# Altium PCB ESP32.PcbDoc (part 3 of 3)
Units mm, origin at the board's own origin, x right, y up, seen from the top; angles counter-clockwise.
Board outline 71.12 x 25.4 mm, 4 copper layers (L1, L2, L3, L4), stack 1.604 mm thick; 64 components, 73 nets, 299 pads, 168 vias.
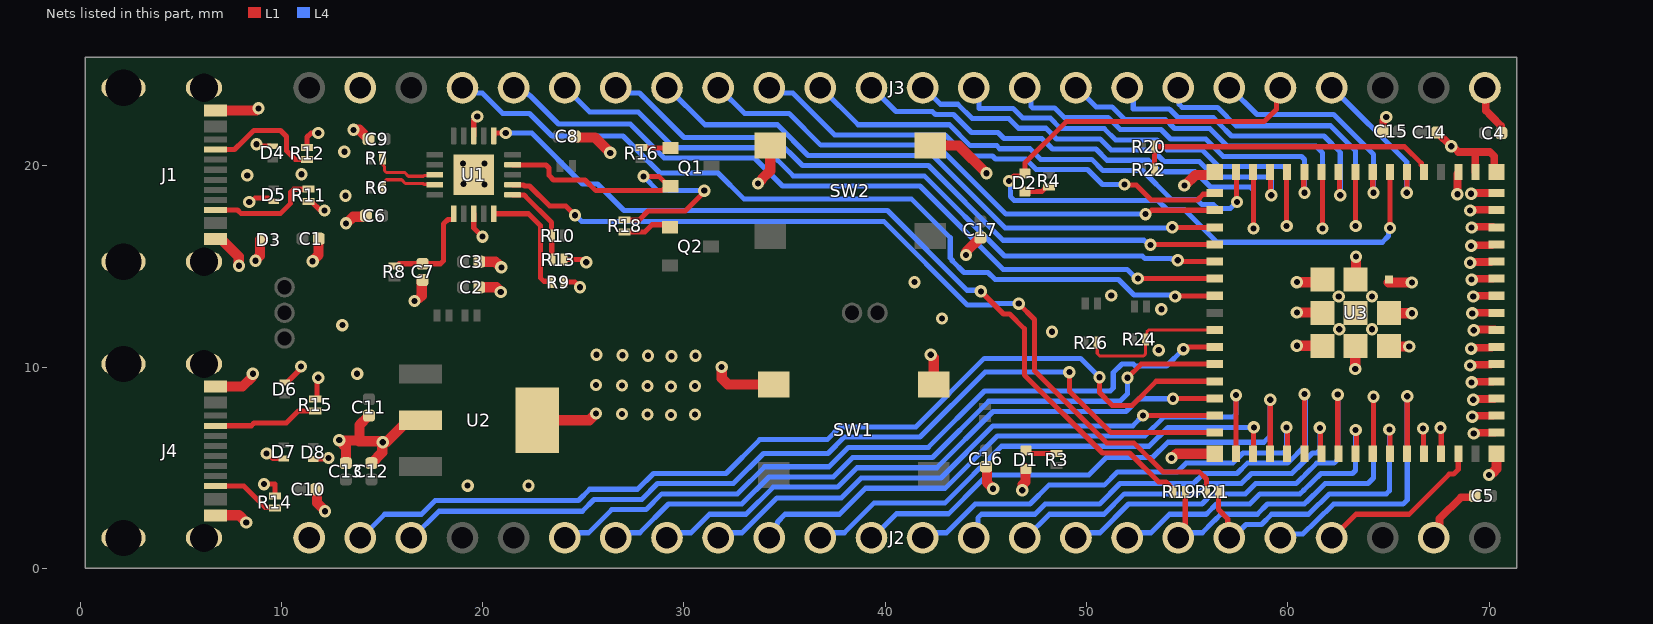
[diagram p4: the nets of this part, all layers, seen from the top]

## Via types
v1: diameter 0.61, hole 0.305, L1 to L4, tented both sides, 168 vias

## Nets (pads, with @x,y where several pads share a name; then routed paths per layer and width w, separated by ;. In a path a pad name is that pad's centre, name@x,y a point inside that pad or via, vN(x,y) a via of type N, cw(c..) or ccw(c..) an arc to the next point about the centre after c; other vN are vias at no path point) (continued)
ESP_USB_P: R24.2 R26.2 U3.24 | length 7.6
  L1 w0.153: R26.2@50.536,11.227 50.536,10.678 50.657,10.557 52.839,10.557 52.929,10.647 R24.2@52.929,11.379 52.999,11.449 52.999,11.757 53.091,11.85 55.765,11.85 U3.24@56.374,11.85
FTDI_RESET: C7.2 R8.2 U1.11 | length 5.2
  L1 w0.254: R8.2@15.621,15.032 15.746,15.032 15.851,15.137 C7.2@17.018,15.137 17.909,15.137 18.058,15.286 18.058,16.942 18.058,17.123 18.275,17.34 18.55,17.34 18.558,17.348 U1.11@18.558,17.623
FTDI_USB_N: R6.2 U1.9 | length 3
  L1 w0.158: R6.2@15.032,18.923 15.128,19.019 15.128,19.221 15.221,19.314 15.977,19.314 16.164,19.127 17.047,19.127 17.085,19.09 17.591,19.09 U1.9@17.623,19.058
FTDI_USB_P: R7.2 U1.8 | length 3
  L1 w0.158: 15.032,20.066 15.128,19.97 15.128,19.768 15.221,19.675 16.127,19.675 16.314,19.489 17.047,19.489 17.085,19.526 17.591,19.526 U1.8@17.623,19.558
GND: C1.1 C2.1 C3.1 C4.1 C5.1 C6.1 C7.1 C8.1 C9.1 C10.1 C11.1 C12.1 C13.1 C14.1 C15.1 C16.1 C17.1 D1.1 D3.1 D4.1 D5.1 D6.1 D7.1 D8.1 J1.A1B12 J1.B1A12 J1.S1 J1.S2 J1.S3 J1.S4 J2.2 J2.24 J3.1 J3.23 J4.A1B12 J4.B1A12 J4.S1 J4.S2 J4.S3 J4.S4 R9.2 R11.1 R12.1 R13.2 R14.1 R15.1 SW1.3 SW1.4 SW2.3 SW2.4 U1.3 U1.13 U1.21 U2.2 U2.4 U3.1 U3.2 U3.42 U3.43 U3.46 U3.47 U3.48 U3.49 U3.50 U3.51 U3.52 U3.53 U3.54 U3.55 U3.56 U3.57 U3.58 U3.59 U3.60 U3.61 U3.62 U3.63 U3.64 U3.65 U3.66 U3.67 U3.68 U3.69 U3.70 U3.71 U3.72 U3.73 | length 102.4
  L1 w0.254: v1(8.407,18.212) 8.504,18.212 8.707,18.415 9.345,18.415 9.494,18.266 9.494,18.255 9.507,18.242 D5.1@9.627,18.242 ; v1(8.769,21.079) 8.865,21.079 8.961,20.983 9.443,20.983 9.456,20.97 D4.1@9.576,20.97 ; v1(9.144,4.191) 9.677,4.191 R14.1@9.677,3.602 ; v1(9.271,5.715) 9.335,5.715 9.584,5.466 D7.1@10.109,5.466 ; D6.1@10.16,9.24 10.28,9.24 10.905,9.865 10.905,9.965 v1(10.973,10.033) ; R12.1@11.278,20.925 11.278,21.438 11.481,21.641 v1(11.836,21.641) ; R11.1@11.354,18.242 11.479,18.242 11.941,17.78 v1(12.141,17.78) ; D8.1@11.582,5.441 11.595,5.454 12.312,5.454 v1(12.344,5.486) ; R15.1@11.684,8.428 11.72,8.428 11.768,8.476 11.768,9.406 v1(11.836,9.474) ; U1.13@19.558,17.623 19.558,16.916 v1(19.99,16.485) ; U1.3@19.558,21.493 19.558,22.276 v1(19.736,22.454) ; R9.2@24.049,14.224 24.587,14.224 v1(24.841,13.97) ; R13.2@24.049,15.342 25.019,15.342 v1(25.146,15.215) ; v1(66.726,6.96) 66.75,6.936 66.75,5.942 U3.42@66.764,5.929 ; U3.43@67.627,5.954 v1@67.627,6.947
  L1 w0.381: C15.1@64.722,21.717 64.745,21.74 64.745,22.276 v1(64.897,22.428) ; J2.2@67.31,1.524 67.538,1.752 67.538,2.464 68.611,3.536 69.222,3.536 C5.1@69.293,3.607 ; C14.1@67.437,21.666 67.437,21.661 68.118,20.98 v1(68.123,20.98) 68.185,20.98 68.469,20.696 69.251,20.696 ; v1@68.433,18.598 U3.2@68.433,19.618 ; v1@69.101,10.122 U3.50@70.094,10.122 ; v1@69.101,15.227 U3.56@70.094,15.227 ; v1@69.101,17.818 U3.59@70.094,17.818 ; v1@69.151,10.96 U3.51@70.144,10.96 ; v1@69.151,16.065 U3.57@70.144,16.065 ; v1@69.151,18.656 U3.60@70.144,18.656 ; v1@69.177,9.284 U3.49@70.17,9.284 ; v1@69.177,14.389 U3.55@70.17,14.389 ; v1@69.177,16.98 U3.58@70.17,16.98 ; v1@69.202,7.582 U3.47@70.195,7.582 ; v1@69.202,12.713 U3.53@70.195,12.713 ; v1@69.253,8.42 U3.48@70.246,8.42 ; v1@69.253,13.551 U3.54@70.246,13.551 ; v1@69.278,6.744 U3.46@70.271,6.744 ; v1@69.278,11.874 U3.52@70.271,11.874 ; U3.1@69.324,19.7 69.324,20.623 69.251,20.696 ; J3.1@69.85,23.876 69.838,23.864 69.838,22.755 70.115,22.479 70.614,21.98 C4.1@70.614,21.635 ; U3.62@70.374,19.7 70.256,19.818 70.256,20.472 70.033,20.696 69.251,20.696
  L1 w0.508: J4.B1A12@6.734,2.64 7.901,2.64 v1(8.255,2.286) ; J4.A1B12@6.734,9.04 8.071,9.04 8.566,9.535 8.566,9.658 v1(8.585,9.677) ; J1.B1A12@6.734,16.36 7.009,16.36 7.88,15.489 7.88,15.056 v1(7.899,15.037) ; J1.A1B12@6.734,22.76 8.765,22.76 v1(8.865,22.86) ; v1(8.712,15.291) 8.712,15.318 8.934,15.54 8.934,16.326 8.94,16.332 D3.1@9.048,16.332 ; v1(11.557,15.265) 11.557,15.293 11.852,15.588 11.852,16.376 C1.1@11.859,16.383 ; C10.1@11.732,3.937 11.773,3.896 11.773,3.266 12.167,2.872 v1(12.167,2.845) ; v1(12.878,6.375) 12.878,6.361 v1@12.883,6.356 ; C13.1@13.208,5.231 13.208,6.031 v1@12.883,6.356 ; v1(13.208,17.145) 13.235,17.145 13.57,17.48 14.159,17.48 14.2,17.521 C6.1@14.2,17.526 ; v1(13.589,21.793) 13.875,21.793 14.327,21.341 C9.1@14.327,21.336 ; C11.1@14.351,7.596 14.346,7.596 14.305,7.555 14.305,7.55 13.888,7.133 13.888,6.344 13.868,6.325 ; C12.1@14.478,5.231 14.483,5.231 15.017,5.765 15.017,6.254 v1(15.037,6.274) 15.056,6.293 15.239,6.293 16.312,7.366 U2.2@16.912,7.366 ; v1@14.959,6.325 13.868,6.325 ; v1@16.866,13.437 16.972,13.543 16.972,14.286 17.013,14.327 C7.1@17.018,14.327 ; C2.1@19.836,13.97 20.676,13.97 v1(20.904,13.741) ; C3.1@19.836,15.24 20.625,15.24 20.726,15.138 20.752,15.138 v1(20.93,14.961) ; U2.4@22.712,7.366 25.298,7.366 v1(25.629,7.696) ; C8.1@24.586,21.463 24.586,21.458 24.627,21.417 25.573,21.417 v1(26.34,20.65) ; v1(31.877,10.008) 31.877,9.442 32.175,9.144 SW1.4@34.468,9.144 ; v1@33.858,19.279 33.858,19.329 34.29,19.761 SW2.4@34.29,21.01 ; SW2.3@42.24,21.01 43.658,21.01 v1(45.034,19.634) ; v1(42.266,10.617) 42.418,10.465 SW1.3@42.418,9.144 ; v1(44.018,15.57) 44.018,15.729 44.724,16.435 C17.1@44.729,16.435 ; C16.1@45.009,5.056 45.014,5.056 45.055,5.015 45.055,4.272 v1(45.364,3.962) ; v1(46.812,3.886) 46.832,3.906 46.832,4.162 46.969,4.299 46.969,4.949 46.973,4.953 D1.1@46.99,4.953 ; v1(54.229,5.486) 54.256,5.486 54.47,5.7 U3.64@56.374,5.7 ; v1(54.866,19.025) 54.893,19.025 55.422,19.554 56.228,19.554 U3.63@56.374,19.7 ; v1(60.452,14.224) 61.598,14.224 U3.71@61.724,14.35 ; v1(60.454,11.066) U3.69@61.6,11.066 ; v1(60.454,12.717) U3.70@61.6,12.717 ; v1(63.356,9.908) U3.68@63.356,11.054 ; U3.72@63.39,14.346 v1(63.39,15.492) ; U3.67@64.892,11.032 v1(66.038,11.032) ; U3.66@65.019,12.683 v1(66.165,12.683) ; U3.61@65.019,14.207 v1(66.165,14.207) ; v1@70.231,4.801 70.374,4.944 U3.65@70.374,5.7 ; v1@12.883,6.356 13.837,6.356 13.868,6.325
  other v1: 19.255,4.115 22.276,4.115 70.002,4.648 69.24,6.706 67.589,6.985 69.164,7.544 29.362,7.62 28.194,7.645 30.556,7.645 26.924,7.671 69.215,8.382 29.362,9.042 28.194,9.068 30.556,9.068 26.924,9.093 25.629,9.119 69.139,9.246 13.767,9.677 69.063,10.084 29.388,10.541 28.219,10.566 30.582,10.566 26.949,10.592 25.654,10.617 53.594,10.846 69.113,10.922 48.285,11.76 69.24,11.836 62.56,11.887 64.186,11.887 13.03,12.09 42.824,12.421 69.164,12.675 53.721,12.878 16.612,13.284 62.535,13.513 64.186,13.513 69.215,13.513 51.232,13.564 41.453,14.224 69.139,14.351 69.063,15.189 69.113,16.027 69.139,16.942 69.063,17.78 13.183,18.517 68.428,18.593 69.113,18.618 20.091,19.075 19.05,19.101 33.68,19.126 8.306,19.533 10.998,19.583 19.025,20.117 20.091,20.117 13.132,20.701
GPIO0: R20.2 R22.2 U3.4 | length 15.2
  L1 w0.254: R22.2@53.386,19.812 R20.2@53.386,20.955 65.808,20.955 66.632,20.131 66.632,20.042 66.774,19.9 U3.4@66.774,19.7
GPIO1: J3.4 U3.5 | length 7.8
  L1 w0.254: v1(65.913,18.669) 65.918,18.674 65.918,19.694 U3.5@65.924,19.7
  L4 w0.254: J3.4@62.23,23.876 65.913,20.193 v1(65.913,18.669)
GPIO2: D2.1 J3.5 U3.6 | length 40
  L1 w0.254: v1(46.152,19.253) 46.405,19.507 46.816,19.507 D2.1@46.939,19.63 46.939,20.142 48.997,22.2 58.826,22.2 59.437,22.81 59.437,23.623 J3.5@59.69,23.876 ; v1(65.076,16.916) U3.6@65.076,19.598
  L4 w0.254: v1(46.152,19.253) 46.22,19.185 46.22,18.48 46.412,18.288 53.548,18.288 54.005,17.831 54.864,17.831 56.49,16.205 64.694,16.205 65.009,16.521 65.009,16.85 v1(65.076,16.916)
GPIO3: J3.6 U3.7 | length 11.4
  L1 w0.254: U3.7@64.224,19.7 64.224,18.707 v1(64.262,18.669)
  L4 w0.254: J3.6@57.15,23.876 58.471,22.555 62.281,22.555 64.262,20.574 v1(64.262,18.669)
GPIO4: J3.7 U3.8 | length 16.9
  L1 w0.254: v1(63.374,17.018) U3.8@63.374,19.7
  L4 w0.254: J3.7@54.61,23.876 54.61,23.06 54.759,22.911 56.492,22.911 ccw(c57.15,23.876) 56.538,22.881 56.582,22.836 57.422,21.996 62.121,21.996 63.374,20.744 v1(63.374,17.018)
GPIO5: J3.8 U3.9 | length 15.5
  L1 w0.254: v1@62.573,18.58 U3.9@62.573,19.573
  L4 w0.254: J3.8@52.07,23.876 52.323,23.623 52.323,22.836 52.337,22.821 54.107,22.821 ccw(c54.61,23.876) 54.149,22.803 54.548,22.403 56.297,22.403 56.577,22.123 57.212,21.488 61.798,21.488 62.611,20.676 v1(62.611,18.542)
GPIO6: J3.9 U3.10 | length 20
  L1 w0.254: v1(61.723,16.891) U3.10@61.723,19.573
  L4 w0.254: J3.9@49.53,23.876 50.483,22.923 51.278,22.923 51.887,22.313 53.92,22.313 54.376,21.857 56.125,21.857 57.001,20.98 61.394,20.98 61.723,20.651 v1(61.723,16.891)
GPIO7: J3.10 U3.11 | length 18.3
  L1 w0.254: v1@60.795,18.707 U3.11@60.795,19.7
  L4 w0.254: J3.10@46.99,23.876 47.243,23.623 47.243,22.963 47.32,22.885 48.412,22.885 48.883,22.415 51.068,22.415 51.677,21.805 53.709,21.805 54.178,21.336 55.927,21.336 56.791,20.472 60.684,20.472 60.833,20.324 v1(60.833,18.669)
GPIO8: J3.11 U3.12 | length 23.1
  L1 w0.254: v1(59.945,17.018) U3.12@59.945,19.7
  L4 w0.254: J3.11@44.45,23.876 44.653,23.673 44.653,22.86 46.354,22.86 46.836,22.377 48.202,22.377 48.728,21.851 50.89,21.851 51.445,21.297 53.499,21.297 53.993,20.803 55.742,20.803 56.581,19.964 59.796,19.964 59.945,19.816 v1(59.945,17.018)
GPIO9: J3.12 U3.13 | length 20.9
  L1 w0.254: v1@59.144,18.58 U3.13@59.144,19.573
  L4 w0.254: J3.12@41.91,23.876 41.935,23.876 42.749,23.063 43.611,23.063 44.322,22.352 46.143,22.352 46.626,21.869 47.992,21.869 48.517,21.343 50.68,21.343 51.234,20.789 53.288,20.789 53.859,20.218 55.608,20.218 56.37,19.456 59.033,19.456 59.182,19.308 v1(59.182,18.542)
GPIO10: J3.13 U3.14 | length 25.6
  L1 w0.254: v1(58.294,16.891) U3.14@58.294,19.573
  L4 w0.254: J3.13@39.37,23.876 40.538,22.708 42.342,22.708 42.495,22.555 43.401,22.555 44.289,21.666 45.6,21.666 45.905,21.361 47.781,21.361 48.307,20.835 50.47,20.835 51.024,20.281 53.078,20.281 53.649,19.71 55.398,19.71 56.16,18.948 58.145,18.948 58.294,18.8 v1(58.294,16.891)
GPIO11: J3.14 U3.15 | length 24.5
  L1 w0.254: U3.15@57.417,19.446 57.433,19.446 57.452,19.427 57.452,18.24 v1(57.48,18.212)
  L4 w0.254: J3.14@36.83,23.876 38.659,22.047 43.19,22.047 44.231,21.006 45.542,21.006 45.695,20.853 47.193,20.853 47.719,20.327 50.259,20.327 50.813,19.773 52.781,19.773 54.216,18.339 55.474,18.339 55.738,18.075 56.315,18.075 56.508,17.882 57.15,17.882 v1(57.48,18.212)
GPIO12: J3.15 U3.16 | length 24.5
  L1 w0.254: v1(51.892,19.075) 51.918,19.05 52.476,19.05 53.218,18.308 55.519,18.308 55.802,18.591 56.315,18.591 U3.16@56.374,18.65
  L4 w0.254: J3.15@34.29,23.876 34.543,23.623 35.408,23.623 37.493,21.539 42.98,21.539 44.021,20.498 45.332,20.498 45.484,20.345 46.983,20.345 47.509,19.819 50.049,19.819 50.793,19.075 v1(51.892,19.075)
GPIO13: J3.16 U3.17 | length 27.3
  L1 w0.254: v1(52.934,17.602) 53.03,17.602 53.228,17.8 U3.17@56.374,17.8
  L4 w0.254: J3.16@31.75,23.876 33.02,22.606 35.23,22.606 36.805,21.031 42.57,21.031 45.999,17.602 v1(52.934,17.602)
GPIO14: J3.17 U3.18 | length 30.1
  L1 w0.254: v1@54.254,16.942 v1(54.263,16.95) U3.18@56.374,16.95
  L4 w0.254: J3.17@29.21,23.876 31.042,22.044 34.649,22.044 36.17,20.523 42.36,20.523 45.966,16.916 54.229,16.916 v1(54.263,16.95)
GPIO15: J3.18 U3.19 | length 32.9
  L1 w0.254: v1(53.188,16.078) 53.209,16.1 U3.19@56.374,16.1
  L4 w0.254: J3.18@26.67,23.876 26.923,23.623 27.788,23.623 29.999,21.412 34.493,21.412 35.891,20.015 42.15,20.015 45.857,16.307 52.863,16.307 53.091,16.078 v1(53.188,16.078)
GPIO16: J3.19 U3.20 | length 35.8
  L1 w0.254: v1(54.534,15.316) 54.6,15.25 U3.20@56.374,15.25
  L4 w0.254: J3.19@24.13,23.876 25.324,22.682 27.737,22.682 29.515,20.904 34.036,20.904 35.434,19.507 41.939,19.507 45.926,15.519 52.777,15.519 52.904,15.392 54.207,15.392 54.215,15.384 54.466,15.384 v1(54.534,15.316)
GPIO17: J3.20 U3.21 | length 38.7
  L1 w0.254: v1(52.553,14.402) v1(52.553,14.402) 56.373,14.401 U3.21@56.374,14.4
  L4 w0.254: J3.20@21.59,23.876 21.947,23.876 22.329,23.494 22.353,23.494 23.765,22.082 27.339,22.082 29.025,20.396 33.503,20.396 34.9,18.999 41.729,18.999 45.868,14.859 52.023,14.859 52.48,14.402 v1(52.553,14.402)
GPIO18: J3.21 U3.22 | length 42.2
  L1 w0.254: v1(54.407,13.513) 54.425,13.531 56.355,13.531 U3.22@56.374,13.55
  L4 w0.254: J3.21@19.05,23.876 19.303,23.623 19.98,23.623 20.997,22.606 22.327,22.606 23.444,21.488 26.975,21.488 28.819,19.644 31.699,19.644 32.979,18.364 41.3,18.364 43.231,16.434 43.231,15.418 43.332,15.316 43.332,15.286 43.912,14.707 45.11,14.707 45.466,14.351 51.587,14.351 52.358,13.581 54.339,13.581 v1(54.407,13.513)
GPIO21: J2.19 U3.25 | length 36.7
  L1 w0.254: v1(54.813,10.897) 54.917,11 U3.25@56.374,11
  L4 w0.254: J2.19@24.13,1.524 24.383,1.777 25.27,1.777 26.415,2.921 28.118,2.921 28.905,3.708 32.667,3.708 34.013,5.055 37.215,5.055 38.178,6.018 42.14,6.018 44.935,8.814 51.185,8.814 51.333,8.963 51.333,9.733 51.761,10.16 52.329,10.16 52.43,10.058 53.975,10.058 v1(54.813,10.897)
GPIO26: J2.18 U3.26 | length 33.7
  L1 w0.254: v1(52.045,9.474) 52.72,10.15 U3.26@56.374,10.15
  L4 w0.254: J2.18@26.67,1.524 26.923,1.777 27.81,1.777 29.234,3.2 32.877,3.2 34.223,4.547 37.425,4.547 38.389,5.51 42.35,5.51 45.146,8.306 51.667,8.306 52.045,8.683 v1(52.045,9.474)
GPIO33: J2.17 U3.28 | length 30
  L1 w0.254: v1(54.305,8.433) 54.322,8.45 U3.28@56.374,8.45
  L4 w0.254: J2.17@29.21,1.524 29.463,1.777 30.35,1.777 31.266,2.692 33.088,2.692 34.434,4.039 37.636,4.039 38.599,5.002 42.561,5.002 45.356,7.798 51.968,7.798 52.603,8.433 v1(54.305,8.433)
GPIO34: J2.16 U3.29 | length 27.1
  L1 w0.254: v1@52.807,7.595 v1(52.812,7.6) U3.29@56.374,7.6
  L4 w0.254: J2.16@31.75,1.524 32.003,1.777 32.89,1.777 34.619,3.505 37.821,3.505 38.81,4.494 42.771,4.494 45.363,7.087 52.299,7.087 v1(52.812,7.6)
GPIO35: J2.15 U3.31 | length 29.6
  L1 w0.254: U3.31@57.428,5.929 v1(57.428,8.611)
  L4 w0.254: J2.15@34.29,1.524 34.29,1.881 34.644,2.236 34.644,2.314 35.023,2.692 37.726,2.692 39.02,3.986 42.982,3.986 45.574,6.579 52.901,6.579 53.841,7.518 57.28,7.518 57.428,7.667 v1(57.428,8.611)
GPIO36: J2.14 U3.32 | length 25.1
  L1 w0.254: U3.32@58.28,5.7 58.296,5.716 58.296,6.988 v1(58.318,7.01)
  L4 w0.254: J2.14@36.83,1.524 37.083,1.777 37.97,1.777 39.438,3.244 42.958,3.244 45.784,6.071 53.111,6.071 54.051,7.01 v1(58.318,7.01)
GPIO37: J2.13 U3.33 | length 26.3
  L1 w0.254: U3.33@59.13,5.7 v1(59.13,8.382)
  L4 w0.254: J2.13@39.37,1.524 40.564,2.718 43.155,2.718 44.679,4.242 44.679,4.246 45.08,4.648 50.119,4.648 50.982,5.512 53.285,5.512 54.047,6.274 58.809,6.274 59.13,6.595 v1(59.13,8.382)
GPIO38: J2.12 U3.34 | length 22
  L1 w0.254: U3.34@59.982,5.979 v1@59.982,6.972
  L4 w0.254: J2.12@41.91,1.524 42.163,1.777 43.05,1.777 44.474,3.2 47.193,3.2 48.133,4.14 50.879,4.14 51.539,4.801 54.513,4.801 54.945,5.232 57.274,5.232 57.782,5.74 59.785,5.74 59.944,5.899 v1(59.944,7.01)
GPIO39: J2.11 U3.35 | length 24.1
  L1 w0.254: U3.35@60.832,5.979 v1(60.832,8.661)
  L4 w0.254: J2.11@44.45,1.524 44.603,1.677 44.603,2.515 44.78,2.692 47.44,2.692 47.948,3.2 50.657,3.2 51.673,4.216 55.316,4.216 55.824,4.724 57.484,4.724 57.992,5.232 59.995,5.232 60.884,6.121 60.884,8.61 v1(60.832,8.661)
GPIO40: J2.10 U3.36 | length 18.5
  L1 w0.254: U3.36@61.633,5.954 v1@61.633,6.947
  L4 w0.254: J2.10@46.99,1.524 48.158,2.692 50.868,2.692 51.884,3.708 55.527,3.708 56.035,4.216 57.694,4.216 58.202,4.724 60.202,4.724 60.276,4.796 60.384,4.902 60.533,5.045 61.229,5.74 61.446,5.74 61.521,5.815 61.595,5.889 v1(61.595,6.985)
GPIO41: J2.9 U3.37 | length 20.5
  L1 w0.254: U3.37@62.483,5.954 v1(62.483,8.636)
  L4 w0.254: J2.9@49.53,1.524 49.783,1.777 50.67,1.777 52.094,3.2 55.739,3.2 56.247,3.708 57.905,3.708 58.413,4.216 60.408,4.216 60.482,4.288 60.59,4.394 60.889,4.682 61.439,5.232 62.306,5.232 62.483,5.409 v1(62.483,8.636)
GPIO42: J2.8 U3.38 | length 15.7
  L1 w0.254: U3.38@63.411,5.852 v1@63.411,6.845
  L4 w0.254: J2.8@52.07,1.524 52.323,1.777 53.21,1.777 54.126,2.692 55.948,2.692 cw(c57.15,1.524) 56.006,2.749 56.457,3.2 58.115,3.2 58.623,3.708 60.614,3.708 60.797,3.886 61.245,4.32 61.65,4.724 63.224,4.724 63.373,4.873 v1(63.373,6.883)
GPIO45: J2.5 U3.41 | length 14.9
  L1 w0.254: U3.41@65.937,5.878 v1(65.937,8.56)
  L4 w0.254: J2.5@59.69,1.524 59.881,1.715 60.751,1.715 61.415,2.362 cw(c62.23,1.524) 61.417,2.363 62.281,3.2 65.735,3.2 65.937,3.403 v1(65.937,8.56)
GPIO46: J2.4 U3.44 | length 8.4
  L1 w0.254: J2.4@62.23,1.524 63.398,2.692 66.033,2.692 68.027,4.686 68.241,4.686 68.474,4.919 U3.44@68.474,5.7
GPIO47: J2.23 U3.27 | length 48
  L1 w0.254: v1(50.648,9.5) 50.648,8.738 51.283,8.103 52.273,8.103 53.471,9.3 U3.27@56.374,9.3
  L4 w0.254: J2.23@13.97,1.524 14.961,2.515 15.138,2.692 16.96,2.692 17.646,3.378 24.765,3.378 25.324,3.937 27.697,3.937 28.484,4.724 32.088,4.724 33.764,6.401 37.124,6.401 37.758,7.034 41.52,7.034 44.925,10.439 49.708,10.439 v1(50.648,9.5)
GPIO48: J2.22 U3.30 | length 45.1
  L1 w0.254: v1(49.149,9.754) 49.149,8.814 51.213,6.75 U3.30@56.374,6.75
  L4 w0.254: J2.22@16.51,1.524 17.831,2.845 24.95,2.845 25.534,3.429 27.907,3.429 28.695,4.216 32.456,4.216 33.955,5.715 37.157,5.715 37.968,6.526 41.731,6.526 44.958,9.754 v1(49.149,9.754)
NetD1_2: D1.2 R3.1 | length 1.6
  L1 w0.254: D1.2@46.99,5.863 47.015,5.863 47.17,5.708 R3.1@48.514,5.708
NetD2_2: D2.2 R4.1 | length 1.3
  L1 w0.254: D2.2@46.939,18.72 47.777,18.72 48.008,18.951 R4.1@48.133,18.951
NetJ1_A5: J1.A5 R12.2 | length 6
  L1 w0.254: J1.A5@6.734,20.81 7.678,20.81 8.103,21.234 8.103,21.239 8.578,21.714 8.585,21.714 8.636,21.765 9.963,21.765 10.262,21.467 10.262,20.752 10.689,20.325 R12.2@11.278,20.325
NetJ1_B5: J1.B5 R11.2 | length 5.5
  L1 w0.254: J1.B5@6.734,17.81 7.824,17.81 8.007,17.628 9.951,17.628 10.465,18.142 10.465,18.693 10.614,18.842 R11.2@11.354,18.842
NetJ4_A5: J4.A5 R15.2 | length 5.3
  L1 w0.254: J4.A5@6.734,7.09 8.505,7.09 8.642,7.226 10.244,7.226 10.846,7.828 R15.2@11.684,7.828
NetJ4_B5: J4.B5 R14.2 | length 3.4
  L1 w0.254: J4.B5@6.734,4.09 8.139,4.09 8.433,3.796 9.068,3.161 9.199,3.03 9.65,3.03 R14.2@9.677,3.002
NetQ1_1: Q1.1 R16.2 | length 1.5
  L1 w0.254: R16.2@27.889,20.882 29.335,20.882 Q1.1@29.343,20.889
NetQ2_1: Q2.1 R18.2 | length 2.4
  L1 w0.254: R18.2@27.051,16.718 28.053,16.718 28.414,17.079 Q2.1@29.343,17.079
NetR9_1: R9.1 U1.15 | length 5.8
  L1 w0.254: U1.15@20.558,17.623 22.28,17.623 22.868,17.036 22.868,14.445 23.041,14.272 23.401,14.272 R9.1@23.449,14.224
RTS_FTDI: Q1.2 R18.1 U1.19 | length 18.2
  L1 w0.254: U1.19@21.493,20.058 21.501,20.05 23.151,20.05 23.299,19.901 23.299,19.532 23.527,19.304 25.091,19.304 25.624,18.77 28.921,18.77 28.967,18.816 29.17,18.816 Q1.2@29.343,18.989 29.243,18.989 28.75,19.482 v1(27.991,19.482) ; R18.1@27.051,17.318 27.784,17.318 28.22,17.754 30.065,17.754 31.013,18.702 v1(31.013,18.771)
  L4 w0.254: v1(27.991,19.482) 28.702,18.771 v1(31.013,18.771)
RXD_FTDI: R19.2 U1.1 | length 42.7
  L1 w0.254: U1.1@20.558,21.493 20.558,21.622 20.566,21.63 v1(21.147,21.63) ; v1(44.755,13.767) 45.881,12.641 46.186,12.641 46.914,11.913 46.914,9.612 50.792,5.734 52.145,5.734 53.587,4.293 53.952,4.293 54.31,3.935 R19.2@54.31,3.81
  L4 w0.254: v1(21.147,21.63) 22.439,21.63 24.968,19.101 25.705,19.101 27.026,17.78 40.114,17.78 44.069,13.825 44.697,13.825 v1(44.755,13.767)
TXD_FTDI: R21.2 U1.17 | length 42.7
  L1 w0.254: U1.17@21.493,19.058 21.501,19.05 22.038,19.05 22.081,19.006 22.334,19.006 23.332,18.009 24.13,18.009 v1(24.587,17.551) ; v1(46.639,13.157) 47.422,12.374 47.422,9.823 51.002,6.242 52.356,6.242 53.797,4.801 55.601,4.801 55.961,4.44 R21.2@55.961,3.81
  L4 w0.254: v1(24.587,17.551) 24.609,17.551 24.914,17.247 39.929,17.247 44.094,13.081 45.281,13.081 45.357,13.157 v1(46.639,13.157)
U0RXD: J2.6 R21.1 U3.40 | length 15.4
  L1 w0.254: R21.1@56.561,3.81 56.561,2.926 57.023,2.464 57.023,1.651 J2.6@57.15,1.524 ; U3.40@65.087,5.878 v1@65.087,6.871
  L4 w0.254: J2.6@57.15,1.524 57.271,1.524 57.932,2.184 58.698,2.184 59.206,2.692 61.027,2.692 61.209,2.87 61.958,3.596 62.07,3.708 64.901,3.708 65.049,3.857 v1(65.049,6.909)
U0TXD: J2.7 R19.1 U3.39 | length 20
  L1 w0.254: J2.7@54.61,1.524 54.61,1.881 54.91,2.181 R19.1@54.91,3.81 ; U3.39@64.261,5.852 v1(64.261,8.534)
  L4 w0.254: J2.7@54.61,1.524 54.863,1.777 55.752,1.777 56.291,2.316 cw(c57.15,1.524) 56.358,2.383 56.667,2.692 58.488,2.692 58.996,3.2 60.821,3.2 61.003,3.378 61.602,3.958 61.86,4.216 63.983,4.216 64.261,4.495 v1(64.261,8.534)
VBUS_SENSE: R10.1 R13.1 U1.16 | length 4.4
  L1 w0.254: U1.16@21.493,18.558 22.064,18.558 22.123,18.498 23.424,17.198 R10.1@23.424,16.535 23.436,16.523 23.436,15.354 R13.1@23.449,15.342
pads on no net: J1.A8 J1.B8 J3.24 J4.A8 J4.B8 U1.2 U1.4 U1.5 U1.6 U1.7 U1.14

## Polygon pours and split planes (outlines as drawn)
+5V_VBUS2 on L1 "+5V_VBUS2_L01_P007" (solid, pour order 7): 9.55,12.065 10.692,12.065 10.82,11.937 10.82,10.744 9.754,9.677 9.754,8.915 9.881,8.788 10.439,8.788 10.439,8.433 10.338,8.331 9.423,8.331 9.093,8.661 9.22,8.788 9.22,11.735
+5V_VBUS1 on L1 "+5V_VBUS1_L01_P006" (solid, pour order 6): 9.474,13.437 9.5,13.411 10.973,13.411 10.973,15.418 11.43,15.875 11.43,17.018 9.474,17.018
+5V on L1 "+5V_L01_P005" (solid, pour order 5): 9.55,13.208 9.55,12.065 11.074,12.065 11.1,12.04 11.354,12.294 11.354,12.471 13.691,12.471 15.494,10.668 15.494,10.135 15.291,9.931 14.732,9.931 14.63,9.83 14.63,9.042 14.478,8.89 14.021,8.89 13.818,8.687 13.818,8.153 13.945,8.026 14.732,8.026 14.859,8.153 14.859,8.534 15.418,9.093 18.085,9.093 18.085,10.262 17.78,10.566 16.231,10.566 13.818,12.979 13.818,13.005 10.998,13.005 10.668,13.335 9.677,13.335
GND on L1 "GND_L01_P009" (solid, pour order 9): 31.369,11.278 31.369,5.283 31.09,5.232 30.912,5.232 20.904,5.232 20.904,6.985 20.549,7.341 18.694,7.341 17.983,6.629 16.104,6.629 15.367,5.893 15.392,5.867 15.392,5.282 14.886,4.775 14.135,4.775 14.135,4.839 13.945,5.029 13.792,4.877 12.598,4.877 12.446,5.029 11.328,5.029 11.328,5.639 11.455,5.766 11.989,5.766 12.471,6.248 12.471,6.604 12.979,7.112 13.411,7.112 13.411,7.493 13.97,8.052 18.364,8.052 18.415,8.103 20.777,8.103 21.412,8.738 21.412,9.093 22.149,9.83 24.689,9.83 24.689,10.922 25.044,11.278
GND on L1 "GND_L01_P008" (solid, pour order 8): 60.046,10.109 62.357,10.109 62.941,9.525 64.084,9.525 64.084,9.55 64.77,10.236 66.65,10.236 66.65,15.723 66.319,16.053 66.243,15.977 59.995,15.977 59.995,15.265 60.046,15.215 60.046,15.24 60.046,15.215 60.046,15.24
+3V3_REG on L1 "+3V3_REG_L01_P004" (solid, pour order 4): 12.827,3.886 16.154,3.886 16.739,4.47 18.263,4.47 18.263,5.156 18.237,5.182 18.745,5.69 19.812,5.69 19.812,5.766 19.812,5.842 19.812,6.655 18.491,6.655 17.424,5.588 15.697,5.588 15.697,5.029 15.507,4.839 12.827,4.839
+3V3_FTDI on L1 "+3V3_FTDI_L01_P002" (solid, pour order 2): 16.764,18.898 16.764,18.161 15.9,17.297 15.367,17.297 15.215,17.145 15.215,16.129 15.189,15.951 15.189,14.757 15.977,14.757 16.205,14.529 16.002,14.326 16.002,14.173 14.859,14.173 14.376,14.656 14.376,16.307 14.808,16.739 14.681,16.866 14.681,17.882 15.672,17.882 16.688,18.898 16.739,18.898
+3V3_FTDI on L1 "+3V3_FTDI_L01_P001" (solid, pour order 1): 24.13,21.844 24.13,19.609 24.079,19.558 23.038,19.558 23.038,20.32 22.758,20.599 22.682,20.523 22.047,20.523 22.047,21.26 22.184,21.396 22.86,21.692 23.546,21.895 23.597,21.844
+3V3 on L1 "+3V3_L01_P000" (solid, pour order 0): 65.202,21.336 65.227,21.311 67.132,21.311 67.132,21.819 67.056,22.033 67.437,22.033 67.437,22.809 67.234,22.885 65.359,22.885 65.359,22.325 65.202,22.033 65.202,21.387
GND on L2 "GND_L02_P011" (solid, pour order 11): 0.787,25.019 0.838,24.968 0.838,0.635 71.088,0.635 71.247,0.794 71.247,25.298 0.787,25.298 0.737,25.248 0.737,0.635 0.914,0.635
+3V3 on L2 "+3V3_L02_P010" (solid, pour order 10): 17.729,24.816 17.729,14.478 16.586,13.335 15.697,13.335 15.697,11.735 16.866,10.566 19.431,13.132 20.168,13.132 20.168,16.027 22.606,18.466 25.375,18.466 27.915,15.926 28.169,16.18 38.506,16.18 38.887,15.646 38.964,15.57 38.964,11.659 40.64,11.659 40.615,12.065 40.615,12.649 40.615,15.646 41.377,16.408 50.114,16.408 50.19,16.485 50.165,16.485 50.165,15.545 54.051,11.659 55.982,11.659 55.982,8.204 58.522,5.664 58.522,0.737 71.298,0.737 71.222,0.813 71.222,25.07 18.009,25.07 17.653,24.714
GND on L3 (split plane): 70.864,0.51 0.764,0.51 0.764,24.89 70.864,24.89

## Silkscreen, mask and mechanical layers (free items; w line width, h text height)
Top Overlay:
  text "J3" at 61.392,21.488 h1.02
  text "BOOT" at 32.995,17.323 h1.02 r90
  text "USR" at 45.364,16.815 h1.02
  text "USB1" at 12.065,13.767 h0.76
  text "UART" at 0.737,13.157 h1.02
  text "+5V" at 12.167,12.344 h0.76
  text "3V3" at 41.046,12.268 h1.02
  text "REG" at 33.985,12.04 h1.02
  text "ESP" at 0.914,11.151 h1.02
  text "USB2" at 12.116,10.947 h0.76
  text "PWR" at 46.33,6.68 h1.02
  text "RESET" at 33.503,5.156 h1.02 r90
  text "J4" at 62.56,2.972 h1.02
Bottom Overlay:
  text "NC" at 10.516,20.091 h1.02 r270
  text "IO1" at 61.493,19.126 h1.02 r270
  text "IO5" at 51.079,19.101 h1.02 r270
  text "IO7" at 46.203,19.075 h1.02 r270
  text "IO6" at 48.59,19.075 h1.02 r270
  text "+5V" at 15.799,19.05 h1.02 r270
  text "IO0" at 63.932,19.05 h1.02 r270
  text "IO8" at 43.612,19.025 h1.02 r270
  text "IO4" at 53.518,19.025 h1.02 r270
  text "3V3" at 66.65,19.025 h1.02 r270
  text "IO9" at 41.173,18.974 h1.02 r270
  text "IO3" at 56.261,18.974 h1.02 r270
  text "GND" at 69.088,18.948 h1.02 r270
  text "IO2" at 58.699,18.898 h1.02 r270
  text "GND" at 13.005,18.821 h1.02 r270
  text "IO11" at 36.271,18.567 h1.02 r270
  text "IO15" at 25.933,18.466 h1.02 r270
  text "IO12" at 33.655,18.44 h1.02 r270
  text "IO16" at 23.317,18.339 h1.02 r270
  text "IO13" at 30.937,18.313 h1.02 r270
  text "IO14" at 28.448,18.263 h1.02 r270
  text "IO10" at 38.887,18.263 h1.02 r270
  text "IO17" at 20.599,18.212 h1.02 r270
  text "IO18" at 18.11,18.161 h1.02 r270
  text "<--PINS-->" at 69.113,7.747 h1.02 r270
  text "ESP32S3" at 54.458,7.239 h3 r270
  text "IO48" at 15.418,4.013 h1.02 r270
  text "IO34" at 30.759,3.962 h1.02 r270
  text "USB+" at 17.856,3.937 h1.02 r270
  text "USB-" at 20.574,3.912 h1.02 r270
  text "IO35" at 33.198,3.886 h1.02 r270
  text "GND" at 10.185,3.861 h1.02 r270
  text "IO36" at 35.916,3.861 h1.02 r270
  text "IO21" at 23.012,3.835 h1.02 r270
  text "IO40" at 46.076,3.835 h1.02 r270
  text "IO26" at 25.527,3.81 h1.02 r270
  text "IO47" at 12.624,3.785 h1.02 r270
  text "IO37" at 38.354,3.785 h1.02 r270
  text "IO41" at 48.514,3.759 h1.02 r270
  text "IO33" at 27.965,3.734 h1.02 r270
  text "IO42" at 51.232,3.734 h1.02 r270
  text "IO38" at 40.843,3.683 h1.02 r270
  text "TXD" at 53.67,3.658 h1.02 r270
  text "IO39" at 43.282,3.607 h1.02 r270
  text "IO46" at 61.341,3.531 h1.02 r270
  text "EN" at 63.779,3.454 h1.02 r270
  text "GND" at 66.497,3.429 h1.02 r270
  text "RXD" at 56.109,3.378 h1.02 r270
  text "3V3" at 68.936,3.353 h1.02 r270
  text "IO45" at 58.547,3.302 h1.02 r270
Top Solder:
  drawing of 18 lines, arcs and shapes, not listed